# Altium PCB Layout.PcbDoc
Units mil, origin at the board's own origin, x right, y up, seen from the top; angles counter-clockwise.
Board outline 7090.03 x 2795.01 mil, 2 copper layers (Top Layer, Bottom Layer); 30 components, 63 nets, 165 pads, 0 vias.
Unrouted connection lines stored in the file: 4.
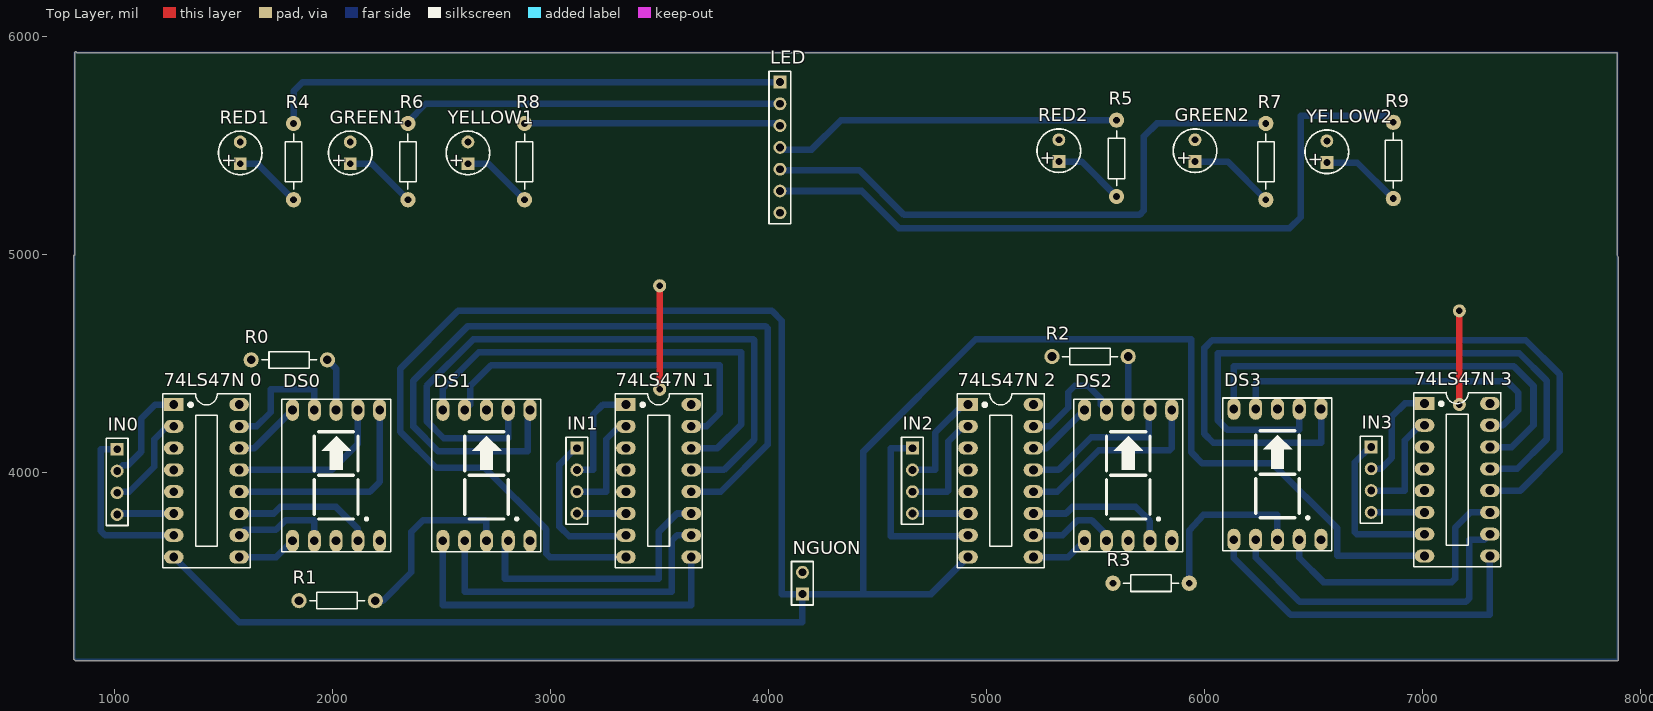
[diagram p0: Top Layer view]
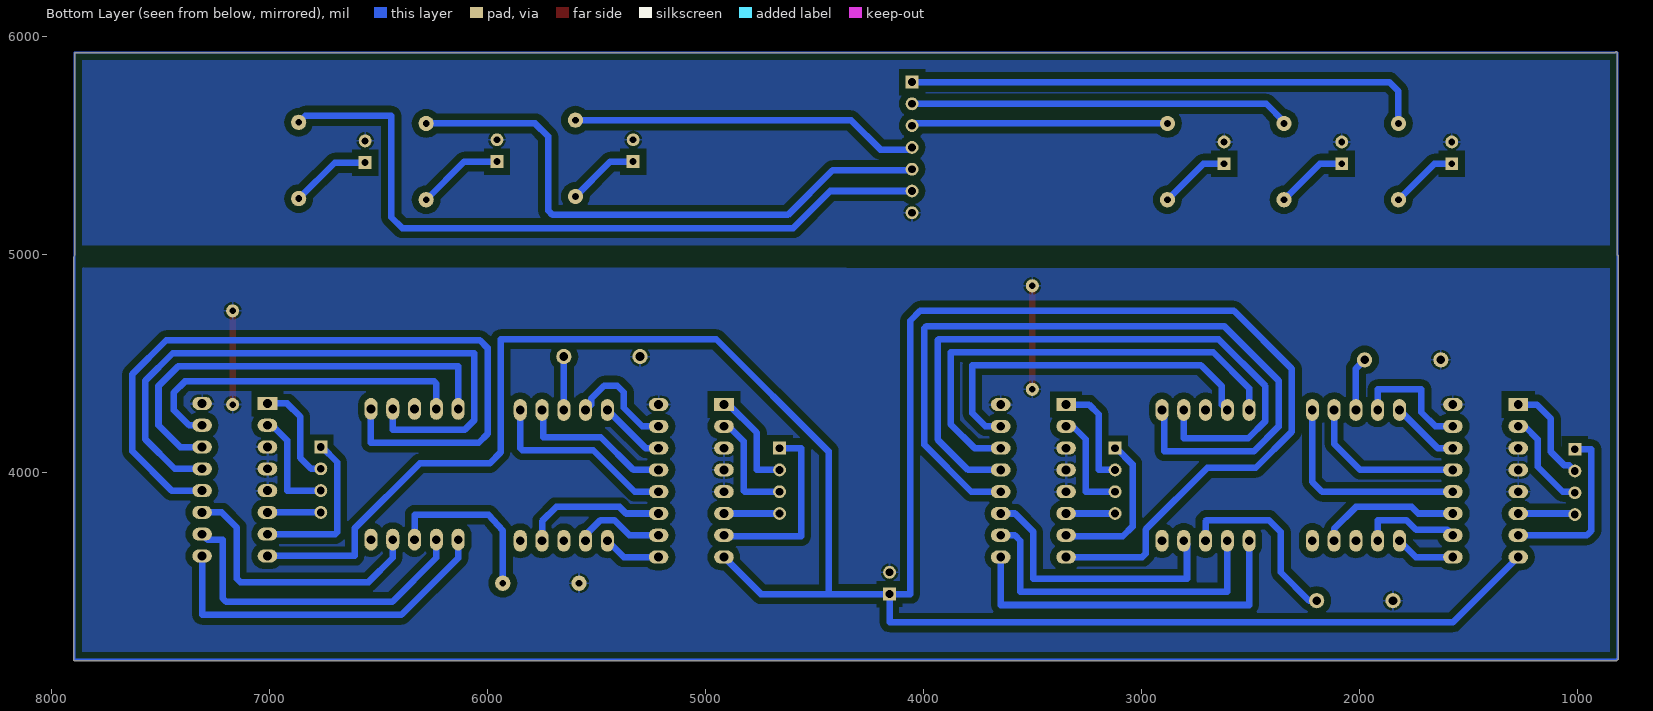
[diagram p1: Bottom Layer view, seen from below]
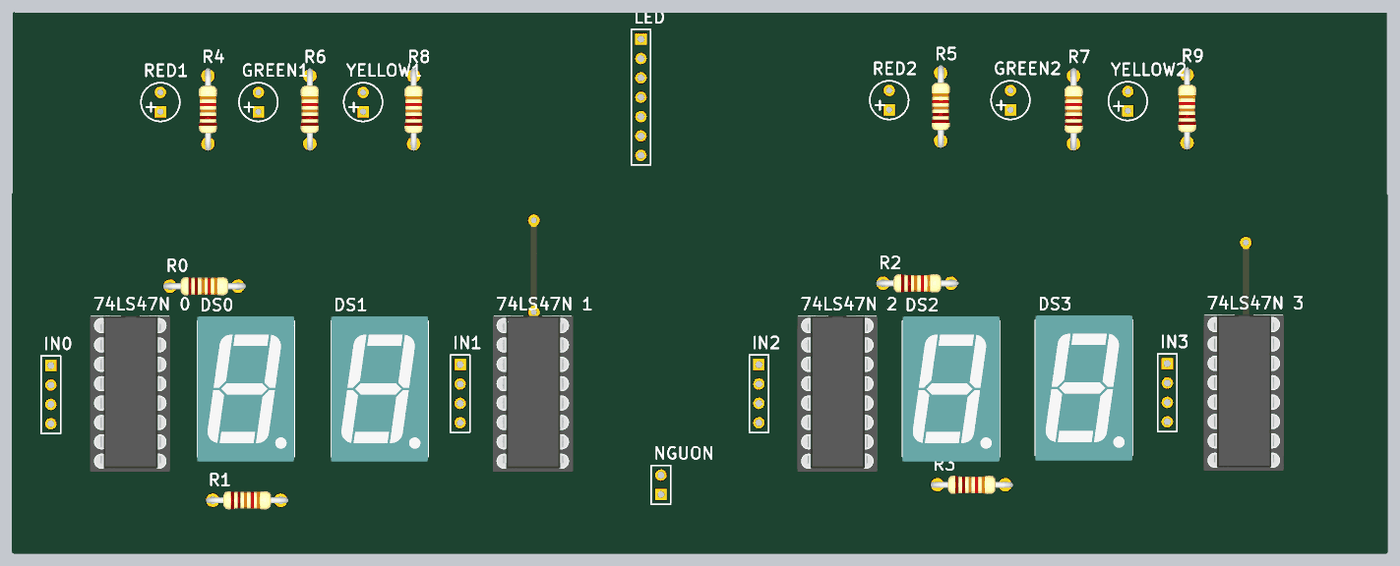
[diagram p2: 3D render of the assembled board from above, using the file's embedded part models]

## Layer stack, top to bottom
Top Solder: solder mask 0.4, Solder Resist, Dk 3.5
Top Layer: signal copper 1.4
Dielectric 1: dielectric 12.6, FR-4, Dk 4.8
Bottom Layer: signal copper 1.4
Bottom Solder: solder mask 0.4, Solder Resist, Dk 3.5

## Board outline
815,4995.01 815,5925 820,5930 825,5925 7895,5925 7895,4995 7900.02,4985 7900.02,4975 7900.02,3140 cw(c7895,3140) 7895,3134.99 820,3134.99 cw(c820,3140) 816.44,3136.47 811.47,3141.44 cw(c815,3145) 809.99,3145 809.98,4990 cw(c815,4990)

## Design rules (kind name [scope] priority, off if disabled: settings)
Clearance [All] p1: gap=30 ignorepadtopadclearanceinfootprint=FALSE except(40: Arc-Hole Track-Hole)
PolygonConnect [All] p1: connectstyle=Relief reliefconductorwidth=10 reliefentries=4 polygonreliefangle="90 Angle" airgapwidth=10
RoutingVias [All] p1: holewidth=50 width=70 viastyle="Through Hole" minholewidth=50 minwidth=70 maxholewidth=50 maxwidth=70
SolderMaskExpansion [All] p1: expansion=4
Width [All] p1: maxlimit=30 minlimit=10 preferedwidth=30
30 further rules are at their usual default settings.

## Components (designator, comment, footprint, x,y, rotation, side; value= is the part's Value field where it differs from the comment)
"74LS47N 0" "DIP16" DIP16/W0.3 1270,4310 r270 top
"74LS47N 1" "DIP16" DIP16/W0.3 3345,4310 r270 top
"74LS47N 2" "DIP16" DIP16/W0.3 4915,4310 r270 top
"74LS47N 3" "DIP16" DIP16/W0.3 7010,4315 r270 top
DS0 "7SEG S" 7SEGS 1815,3685 r0 top value="LED 7S SEG"
DS1 "7SEG S" 7SEGS 2505,3685 r0 top value="LED 7S SEG"
DS2 "7SEG S" 7SEGS 5450,3685 r0 top value="LED 7S SEG"
DS3 "7SEG S" 7SEGS 6135,3690 r0 top value="LED 7S SEG"
GREEN1 "LED5" LED5MM 2079.82,5415 r90 top
GREEN2 "LED5" LED5MM 5956.75,5425 r90 top
IN0 "Header 4" HDR1X4 1010,4105 r270 top
IN1 "Header 4" HDR1X4 3120,4110 r270 top
IN2 "Header 4" HDR1X4 4660,4110 r270 top
IN3 "Header 4" HDR1X4 6765,4115 r270 top
LED "Header 7" HDR1X7 4051.75,5790 r270 top
NGUON "Header 2" HDR1X2 4155,3440 r90 top
R0 "1k" R1/4W#1 1975,4515 r180 top value="R1/4W - 1K"
R1 "1k" R1/4W#1 2195,3410 r180 top value="R1/4W - 1K"
R2 "1k" R1/4W#1 5650,4530 r180 top value="R1/4W - 1K"
R3 "1k" R1/4W#2 5930,3490 r180 top value="R1/4W - 1K"
R4 "1k" R1/4W#2 1819.82,5600 r270 top value="R1/4W - 1K"
R5 "1k" R1/4W#2 5596.75,5615 r270 top value="R1/4W - 1K"
R6 "1k" R1/4W#2 2344.82,5600 r270 top value="R1/4W - 1K"
R7 "1k" R1/4W#2 6281.75,5600 r270 top value="R1/4W - 1K"
R8 "1k" R1/4W#2 2879.82,5600 r270 top value="R1/4W - 1K"
R9 "1k" R1/4W#2 6866.75,5605 r270 top value="R1/4W - 1K"
RED1 "LED5" LED5MM 1574.82,5415 r90 top
RED2 "LED5" LED5MM 5331.75,5425 r90 top
YELLOW1 "LED5" LED5MM 2619.82,5415 r90 top
YELLOW2 "LED5" LED5MM 6561.75,5420 r90 top

## Footprints (in the part's own frame and the unit in brackets; to place one, negate y for a bottom-side part, rotate by r counter-clockwise, add the part's x,y. Pads: shape width x height; smd on the part's side, far side on the other; paste and mask are expansions set on the pad)
7SEGS [mil] "DIP 10 Leads; Body 12 x 15 mm; Pitch 0.5 mm"
  oval 60x100 hole 40: 1(0,0) 2(100,0) 3(200,0) 4(300,0) 5(400,0) 6(400,600) 7(300,600) 8(200,600) 9(100,600) 10(0,600)
  silkscreen extent -50,-50 450,650, body extent -50,-75 450,675, height 316
DIP16/W0.3 [mil] "16 PIN, W 300mil, Pin to pin 100mil"
  rect 60x90 hole 40: 1(0,0)
  oval 60x90 hole 40: 2(100,0) 3(200,0) 4(300,0) 5(400,0) 6(500,0) 7(600,0) 8(700,0) 9(700,300) 10(600,300) 11(500,300) 12(400,300) 13(300,300) 14(200,300) 15(100,300) 16(0,300)
  silkscreen extent -50,-50 750,350, body extent -52,-57 752,356, height 299
HDR1X2 [mm] "Connector; Header; 2 Position"
  rect 1.5x1.5 hole 0.9: 1(0,0)
  round 1.5 hole 0.9: 2(2.54,0)
  silkscreen extent -1.27,-1.27 3.81,1.27
HDR1X4 [mm] "Connector; Header; 4 Position"
  rect 1.5x1.5 hole 0.9: 1(0,0)
  round 1.5 hole 0.9: 2(2.54,0) 3(5.08,0) 4(7.62,0)
  silkscreen extent -1.27,-1.27 8.89,1.27
HDR1X7 [mm] "Connector; Header; 7 Position"
  rect 1.5x1.5 hole 0.9: 1(0,0)
  round 1.5 hole 0.9: 2(2.54,0) 3(5.08,0) 4(7.62,0) 5(10.16,0) 6(12.7,0) 7(15.24,0)
  silkscreen extent -1.27,-1.27 16.51,1.27
LED5MM [mm]
  rect 1.5x1.5 hole 0.8: 1(0,0)
  round 1.5 hole 0.8: 2(2.54,0)
  silkscreen extent -1.27,-2.54 3.81,2.54
R1/4W#1 [mil] "R 1/4W, 2 Pin, 350mil"
  round 70 hole 40: 1(0,0) 2(350,0)
  silkscreen extent 48,-38 302,38, body extent -40,-47 386,47, height 111
R1/4W#2 [mil] "R 1/4W, 2 Pin, 350mil"
  round 70 hole 31: 1(0,0) 2(350,0)
  silkscreen extent 48,-38 302,38, body extent -40,-47 386,47, height 111

## Part data
DS0 DS1 DS2 DS3: library part LED7S, "Single 7 Seg Dipslay"
GREEN1 GREEN2 RED1 RED2 YELLOW1 YELLOW2: library part "LED 5mm", "LED 5mm"
IN0 IN1 IN2 IN3: "Header, 4-Pin", LatestRevisionDate=17-Jul-2002, LatestRevisionNote="Re-released for DXP Platform.", Publisher="Altium Limited"
LED: "Header, 7-Pin", LatestRevisionDate=17-Jul-2002, LatestRevisionNote="Re-released for DXP Platform.", Publisher="Altium Limited"
NGUON: "Header, 2-Pin", LatestRevisionDate=17-Jul-2002, LatestRevisionNote="Re-released for DXP Platform.", Publisher="Altium Limited"
R0 R1 R2 R3 R4 R5 R6 R7 R8 R9: library part R1/4W, "Resistor 1/4W"

## Free pads (board coordinates)
  round 60 hole 30: 2(3500,4380) 3(3500,4855) 4(7170,4310) 5(7170,4740)

## Nets (pads, with @x,y where several pads share a name; then routed paths per layer and width w, separated by ;. In a path a pad name is that pad's centre, name@x,y a point inside that pad or via, vN(x,y) a via of type N, cw(c..) or ccw(c..) an arc to the next point about the centre after c; other vN are vias at no path point)
A0: "74LS47N 0.13" DS0.7 | length 749.7
  Bottom Layer w30: 1570,4010 1995,4010 2115,4130 DS0.7
A1: "74LS47N 1.13" DS1.7 | length 3097.8
  Bottom Layer w30: DS1.7 2805,4155 2508.93,4155 2430,4233.93 2430,4394.85 2645.15,4610 3930,4610 3935,4605 3935,4150 3795,4010 3645,4010
A2: "74LS47N 2.13" DS2.7 | length 719.2
  Bottom Layer w30: 5215,4010 5330,4010 5480,4160 5745,4160 5745,4280 DS2.7
A3: "74LS47N 3.13" DS3.7 | length 2941.9
  Bottom Layer w30: DS3.7 6435,4195 6103.93,4195 6060,4238.93 6060,4545 7444.85,4545 7570,4419.85 7570,4150 7435,4015 7310,4015
B0: "74LS47N 0.12" DS0.6 | length 993.6
  Bottom Layer w30: 1570,3910 2170,3910 2215,3955 DS0.6
B1: "74LS47N 1.12" DS1.6 | length 3683.8
  Bottom Layer w30: DS1.6 2895,4275 2895,4095 2484.08,4095 2370,4209.08 2370,4419.71 2620.29,4670 3985,4670 3995,4660 3995,4125.15 3779.85,3910 3645,3910
B2: "74LS47N 2.12" DS2.6 | length 892.8
  Bottom Layer w30: 5215,3910 5325,3910 5515,4100 5840,4100 5850,4110 DS2.6
B3: "74LS47N 3.12" DS3.6 | length 3559.7
  Bottom Layer w30: DS3.6 6535,4135 6040,4135 6000,4175 6000,4570 6035,4605 7475,4605 7630,4450 7630,4095.15 7449.85,3915 7310,3915
C0: "74LS47N 0.11" DS0.4 | length 653.8
  Bottom Layer w30: 1570,3810 1729.08,3810 1759.08,3840 2015,3840 2115,3740 DS0.4
C1: "74LS47N 1.11" DS1.4 | length 1286.4
  Bottom Layer w30: DS1.4 2790,3670 2790,3510 3495,3510 3495,3725 3580,3810 3645,3810
C2: "74LS47N 2.11" DS2.4 | length 664.4
  Bottom Layer w30: 5215,3810 5364.08,3810 5394.08,3840 5685,3840 5750,3775 DS2.4
C3: "74LS47N 3.11" DS3.4 | length 1275
  Bottom Layer w30: DS3.4 6435,3606.36 6546.36,3495 7135,3495 7150,3510 7150,3745 7220,3815 7310,3815
D0: "74LS47N 0.10" DS0.2 | length 469
  Bottom Layer w30: 1570,3710 1595,3735 1738.93,3735 1783.93,3780 1915,3780 DS0.2
D1: "74LS47N 1.10" DS1.2 | length 1520.4
  Bottom Layer w30: DS1.2 2605,3450 3555,3450 3555,3685 3580,3710 3645,3710
D2: "74LS47N 2.10" DS2.2 | length 418.6
  Bottom Layer w30: 5215,3710 5348.93,3710 5418.93,3780 5481.07,3780 5550,3711.07 DS2.2
D3: "74LS47N 3.10" DS3.2 | length 1528.6
  Bottom Layer w30: DS3.2 6235,3606.36 6436.36,3405 7200,3405 7215,3420 7215,3690 7285,3690 7310,3715
E0: "74LS47N 0.9" DS0.1 | length 276.1
  Bottom Layer w30: 1570,3610 1740,3610 DS0.1
E1: "74LS47N 1.9" DS1.1 | length 1655
  Bottom Layer w30: DS1.1 2505,3390 3645,3390 3645,3610
E2: "74LS47N 2.9" DS2.1 | length 266.1
  Bottom Layer w30: 5215,3610 5375,3610 DS2.1
E3: "74LS47N 3.9" DS3.1 | length 1637.7
  Bottom Layer w30: DS3.1 6135,3605 6395,3345 7310,3345 7310,3615
F0: "74LS47N 0.15" DS0.9 | length 571.9
  Bottom Layer w30: 1570,4210 1650,4210 1715,4275 1715,4380 1915,4380 DS0.9
F1: "74LS47N 1.15" DS1.9 | length 1678.8
  Bottom Layer w30: DS1.9 2630,4310 2630,4393.64 2726.36,4490 3775,4490 3775,4270 3715,4210 3645,4210
F2: "74LS47N 2.15" DS2.9 | length 515
  Bottom Layer w30: 5215,4210 5290,4210 5375,4295 5375,4366.07 5405,4396.07 5465,4396.07 5525,4336.07 5525,4310 DS2.9
F3: "74LS47N 3.15" DS3.9 | length 1585.4
  Bottom Layer w30: DS3.9 6235,4406.07 6245,4416.07 7388.93,4416.07 7440,4365 7440,4285 7370,4215 7310,4215
G0: "74LS47N 0.14" DS0.10 | length 317.5
  Bottom Layer w30: 1570,4110 1640,4110 DS0.10
G1: "74LS47N 1.14" DS1.10 | length 2143.9
  Bottom Layer w30: DS1.10 2505,4385 2670,4550 3875,4550 3875,4220 3765,4110 3645,4110
G2: "74LS47N 2.14" DS2.10 | length 307.5
  Bottom Layer w30: 5215,4110 5275,4110 DS2.10
G3: "74LS47N 3.14" DS3.10 | length 2028.7
  Bottom Layer w30: DS3.10 6135,4485 7420,4485 7510,4395 7510,4215 7410,4115 7310,4115
GND: "74LS47N 0.8" "74LS47N 1.8" "74LS47N 2.8" "74LS47N 3.8" NGUON.1 | length 13060.5
  Bottom Layer w30: 1270,3610 1570,3310 4155,3310 NGUON.1 ; 3345,3610 2995,3610 2980,3625 2980,3736.07 2696.07,4020 2474.23,4020 2310,4184.23 2310,4475 2575,4740 4015,4740 4060,4695 4060,3440 NGUON.1 ; 4915,3610 4745,3440 4435,3440 ; 7010,3615 6610,3615 6610,3741.07 6311.07,4040 5990.4,4040 5940,4090.4 5940,4610 4950,4610 4435,4095 4435,3440 ; NGUON.1 4435,3440
NetDS0_3: DS0.3 DS0.8 R0.1 | length 246.6
  Bottom Layer w30: R0.1 2015,4475 DS0.8
NetDS1_3: DS1.3 DS1.8 R1.1 | length 863.7
  Bottom Layer w30: R1.1 2230,3410 2360,3540 2360,3725 2415,3780 2700,3780 2705,3775 DS1.3
NetDS2_3: DS2.3 DS2.8 R2.1 | length 245
  Bottom Layer w30: DS2.8 R2.1
NetDS3_3: DS3.3 DS3.8 R3.1 | length 800.5
  Bottom Layer w30: R3.1@5945,3490 5930,3505 5930,3730 5995,3805 6335,3805 DS3.3
NetGREEN1_1: GREEN1.1 R6.2 | length 333.3
  Bottom Layer w30: GREEN1.1 2179.82,5415 R6.2
NetGREEN1_2: GREEN1.2 GREEN2.2 LED.7 RED1.2 RED2.2 YELLOW1.2 YELLOW2.2
NetGREEN2_1: GREEN2.1 R7.2 | length 397.5
  Bottom Layer w30: GREEN2.1 6106.75,5425 R7.2
NetLED_1: LED.1 R4.1 | length 2397.4
  Bottom Layer w30: R4.1 1819.82,5748.07 1861.75,5790 LED.1
NetLED_2: LED.2 R6.1 | length 1748.9
  Bottom Layer w30: R6.1 2344.82,5608.07 2426.75,5690 LED.2
NetLED_3: LED.3 R8.1 | length 1176.1
  Bottom Layer w30: R8.1 4041.75,5600 LED.3
NetLED_4: LED.4 R5.1 | length 1605.1
  Bottom Layer w30: LED.4 4061.75,5480 4197.14,5480 4332.14,5615 R5.1
NetLED_5: LED.5 R7.1 | length 2706.9
  Bottom Layer w30: LED.5 4056.75,5385 4340,5385 ; 4356.75,5385 4340,5385 ; R7.1 5781.75,5600 5721.75,5540 5721.75,5200 5701.75,5180 4621.75,5180 4416.75,5385 4340,5385
NetLED_6: LED.6 R9.1 | length 3383.6
  Bottom Layer w30: LED.6 4426.89,5290 4596.89,5120 6391.75,5120 6441.75,5170 6441.75,5635 6836.75,5635 R9.1
NetR4_2: R4.2 RED1.1 | length 313.3
  Bottom Layer w30: RED1.1 1654.82,5415 R4.2
NetR5_2: R5.2 RED2.1 | length 331.3
  Bottom Layer w30: RED2.1 5436.75,5425 R5.2
NetR8_2: R8.2 YELLOW1.1 | length 328.3
  Bottom Layer w30: YELLOW1.1 2714.82,5415 R8.2
NetR9_2: R9.2 YELLOW2.1 | length 373.3
  Bottom Layer w30: YELLOW2.1 6701.75,5420 R9.2
VCC: "74LS47N 0.3" "74LS47N 0.4" "74LS47N 0.5" "74LS47N 0.16" "74LS47N 1.3" "74LS47N 1.4" "74LS47N 1.5" "74LS47N 1.16" "74LS47N 2.3" "74LS47N 2.4" "74LS47N 2.5" "74LS47N 2.16" "74LS47N 3.3" "74LS47N 3.4" "74LS47N 3.5" "74LS47N 3.16" NGUON.2 pad.2 pad.3 pad.4 pad.5 R0.2 R1.2 R2.2 R3.2 | length 905
  Top Layer w30: pad.2 pad.3 ; pad.4 pad.5
Y00: "74LS47N 0.7" IN0.1 | length 793.3
  Bottom Layer w30: IN0.1 935,4105 935,3730 955,3710 1270,3710
Y01: "74LS47N 0.1" IN0.2 | length 475.8
  Bottom Layer w30: IN0.2 1035.47,4030.47 1058.17,4030.47 1120,4092.31 1120,4245 1185,4310 1270,4310
Y02: "74LS47N 0.2" IN0.3 | length 465.2
  Bottom Layer w30: IN0.3@1015.4,3905 IN0.3 1015,3910 1065.4,3910 1180,4024.6 1180,4150 1240,4210 1270,4210
Y03: "74LS47N 0.6" IN0.4 | length 262.1
  Bottom Layer w30: IN0.4 1015,3810 1270,3810
Y10: "74LS47N 1.7" IN1.1 | length 722
  Bottom Layer w30: IN1.1 3114.6,4110 3040,4035.4 3040,3750 3085,3705 3340,3705 3345,3710
Y11: "74LS47N 1.1" IN1.2 | length 498.6
  Bottom Layer w30: IN1.2 3195,4010 3195,4265 3240,4310 3345,4310
Y12: "74LS47N 1.2" IN1.3 | length 475.5
  Bottom Layer w30: IN1.3@3135,3910 3255,3910 3255,4151.07 3313.93,4210 3345,4210
Y13: "74LS47N 1.6" IN1.4 | length 210
  Bottom Layer w30: IN1.4@3135,3810 3345,3810
Y20: "74LS47N 2.7" IN2.1 | length 862.1
  Bottom Layer w30: IN2.1 4560,4110 4560,3705 4910,3705 4915,3710
Y21: "74LS47N 2.1" IN2.2 | length 479.5
  Bottom Layer w30: IN2.2 4765,4010 4765,4181.07 4893.93,4310 4915,4310
Y22: "74LS47N 2.2" IN2.3 | length 511.7
  Bottom Layer w30: IN2.3 4820,3910 4825,3915 4825,4141.07 4893.93,4210 4915,4210
Y23: "74LS47N 2.6" IN2.4 | length 255
  Bottom Layer w30: IN2.4 4915,3810
Y30: "74LS47N 3.7" IN3.1 | length 748.4
  Bottom Layer w30: IN3.1 6759.6,4115 6690,4045.4 6690,3725 6700,3715 7010,3715
Y31: "74LS47N 3.1" IN3.2 | length 480.6
  Bottom Layer w30: IN3.2 6810,4015 6860,4065 6860,4255 6920,4315 7010,4315
Y32: "74LS47N 3.2" IN3.3 | length 504.6
  Bottom Layer w30: IN3.3 6920,3915 6920,4146.07 6988.93,4215 7010,4215
Y33: "74LS47N 3.6" IN3.4 | length 245
  Bottom Layer w30: IN3.4 7010,3815
pads on no net: DS0.5 DS1.5 DS2.5 DS3.5
copper on no net: | length 28669.1
  Bottom Layer w10: 7895,4990 7895,4975 ; 815,3145 815,4990 ; 815,3145 820,3140 ; 815,3145 820,3140 ; 815,3145 815,4990 ; 815,4990 815,5915 815,5925 7895,5925 7895,4985 7895,4975 ; 820,3140 7895,3140 ; 820,3140 7895,3140 ; 7895,3140 7895,4975

## Polygon pours and split planes (outlines as drawn)
NetGREEN1_2 on Bottom Layer (solid, pour order 12): 815,5925 815,5000 855,5040 7895,5040 7895,5925
no net on Bottom Layer (solid, pour order 10): 830,5915
VCC on Bottom Layer (solid, pour order 8): 815,4935 815,3145 820,3140 7885,3140 7885,4920 7880,4925 7880,4940
no net on Bottom Layer (solid, pour order 6): 815,4860

## Text inside footprints (layer, text, board x,y; h text height)
GREEN1: Top Overlay "+" at 2054.82,5395 h60 r90
GREEN2: Top Overlay "+" at 5931.75,5405 h60 r90
RED1: Top Overlay "+" at 1549.82,5395 h60 r90
RED2: Top Overlay "+" at 5306.75,5405 h60 r90
YELLOW1: Top Overlay "+" at 2594.82,5395 h60 r90
YELLOW2: Top Overlay "+" at 6536.75,5400 h60 r90